# EAGLE board PCB-Switches (EAGLE 9.5.2)
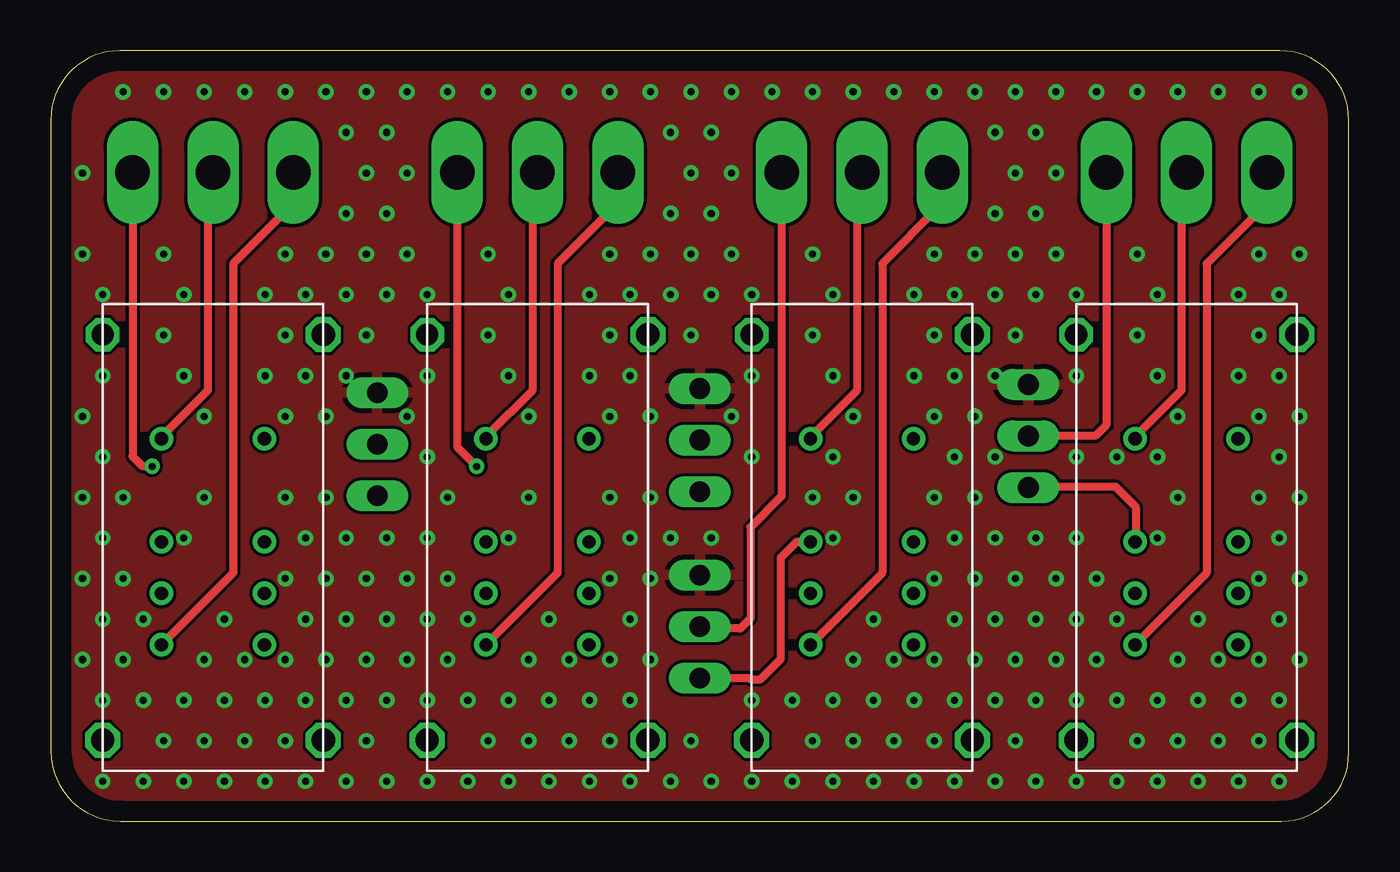
[diagram p0: board, top side]
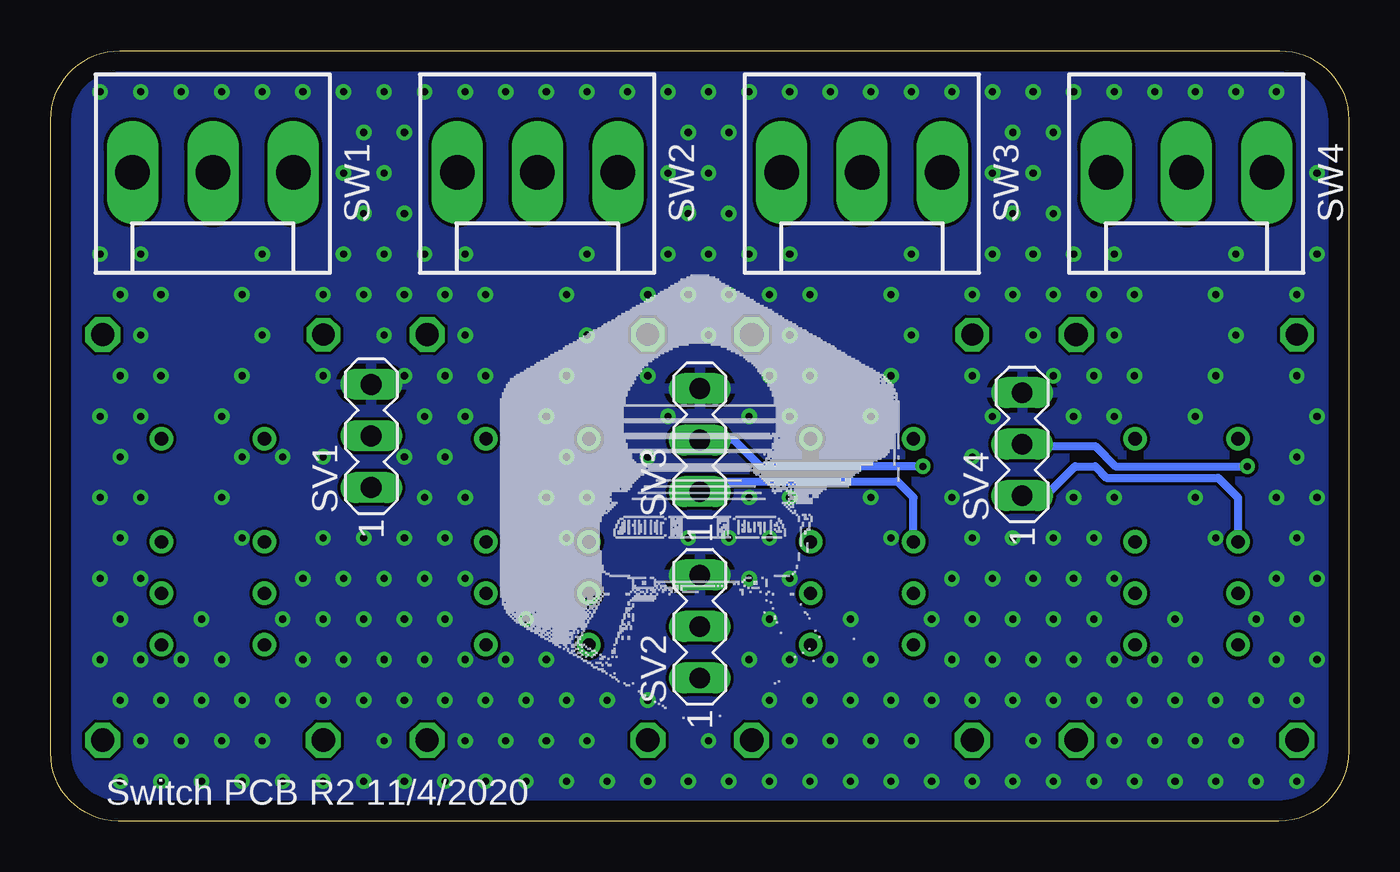
[diagram p1: board, bottom side, seen from below]

Size 64 x 38 mm. Coordinates in mm from the lower left corner, seen from the top.
Outline: 0,34.59 0,3.45 arc89 3.45,0 60.68,0 arc90 64,3.38 64,34.59 arc90 60.59,38 3.41,38 arc90 0,34.59
Copper layers (1*16): Top 0.035mm / dielectric 1.5mm / Bottom 0.035mm
Design rules "default": minimum track width 6mil, minimum drill 0.35mm, track to track 6mil, track to pad 6mil, pad to pad 6mil, via to via 6mil, smd to smd 6mil, copper to edge 40mil, drill to drill 6mil, minimum pad ring 10mil, minimum via ring 8mil, stop-mask expansion 4mil, vias tented up to drill 0.5mm, thermal gap 10mil

## Footprints (pad centres in the part's own frame; a part is rotated, then mirrored left to right if it is on the bottom)
MA03-1 = drill 1.016 long: 1 -2.54,0; 2 0,0; 3 2.54,0
KK-156-3 = drill 1.7 pad 2.184 long: 1 -3.96,0; 2 0,0; 3 3.96,0
ARCADESWITCH = drill 0.65: LI -2.54,-0.22; LN1 -2.54,4.86; LN2 -2.54,-5.3; LNC -2.54,-2.76; R1 2.54,-0.22; RN1 2.54,4.86; RN2 2.54,-5.3; RNC 2.54,-2.76 | drill 1.1 octagon: P$9 -5.44,10 | drill 1.15 octagon: P$10 -5.44,-10; P$11 5.44,10; P$12 5.44,-10

## Placement (x,y rotation side)
SV1  [MA03-1]  48.2,19 90 bottom
SV2  [MA03-1]  32,9.6 90 bottom
SV3  [MA03-1]  32,18.8 90 bottom
SV4  [MA03-1]  16.1,18.6 90 bottom
SW1  [KK-156-3]  56,32 180 bottom
SW2  [KK-156-3]  40,32 180 bottom
SW3  [KK-156-3]  24,32 180 bottom
SW4  [KK-156-3]  8,32 180 bottom
U$1  ARCADESWITCH  [ARCADESWITCH]  56,14 0 top
U$2  ARCADESWITCH  [ARCADESWITCH]  40,14 0 top
U$3  ARCADESWITCH  [ARCADESWITCH]  24,14 0 top
U$4  ARCADESWITCH  [ARCADESWITCH]  8,14 0 top

## Library data of the parts
SV1-SV4 = con-lstb; OC_FARNELL: unknown; OC_NEWARK: unknown
SW1-SW4 = con-molex; MF: MOLEX; OC_FARNELL: unknown; OC_NEWARK: unknown
U$1-U$4 = Arcade Switch

## Nets
GND: SV1.3 SV2.3 SV3.3 SV4.3
SW1A: SW1.2 U$1.LN1
SW1B: SW1.3 U$1.LN2
SW1J: SV1.1 U$1.LI
SW1P: SV1.2 SW1.1
SW2A: SW2.2 U$2.LN1
SW2B: SW2.3 U$2.LN2
SW2J: SV2.1 U$2.LI
SW2P: SV2.2 SW2.1
SW3A: SW3.2 U$3.LN1
SW3B: SW3.3 U$3.LN2
SW3J: SV3.1 U$3.LI
SW3P: SV3.2 SW3.1
SW4A: SW4.2 U$4.LN1
SW4B: SW4.3 U$4.LN2
SW4J: SV4.1 U$4.LI
SW4P: SV4.2 SW4.1

## Tracks (layer width: path | path; a pad name or v marks a point on that pad's centre or on a via)
GND  (via drill 0.35)
  other vias: 2.57,1.97 2.57,5.97 1.57,7.97 2.57,9.97 1.57,11.97 2.57,13.97 1.57,15.97 2.57,17.97 1.57,19.97 2.57,21.97 2.57,25.97 1.57,27.97 1.57,31.97 4.57,1.97 4.57,5.97 3.57,7.97 4.57,9.97 3.57,11.97 3.57,15.97 3.57,35.97 6.57,1.97 5.57,3.97 6.57,5.97 6.57,13.97 6.57,21.97 5.57,23.97 6.57,25.97 5.57,27.97 5.57,35.97 8.57,1.97 7.57,3.97 8.57,5.97 7.57,7.97 8.57,9.97 7.57,15.97 7.57,19.97 7.57,35.97 10.57,1.97 9.57,3.97 10.57,5.97 9.57,7.97 10.57,21.97 10.57,25.97 9.57,35.97 12.57,1.97 11.57,3.97 12.57,5.97 11.57,7.97 12.57,9.97 11.57,11.97 12.57,13.97 11.57,15.97 11.57,19.97 12.57,21.97 11.57,23.97 12.57,25.97 11.57,27.97 11.57,35.97 14.57,1.97 14.57,5.97 13.57,7.97 14.57,9.97 13.57,11.97 14.57,13.97 13.57,15.97 13.57,19.97 14.57,21.97 14.57,25.97 13.57,27.97 14.57,29.97 14.57,33.97 13.57,35.97 16.57,1.97 15.57,3.97 16.57,5.97 15.57,7.97 16.57,9.97 15.57,11.97 16.57,13.97 15.57,23.97 16.57,25.97 15.57,27.97 16.57,29.97 15.57,31.97 16.57,33.97 15.57,35.97 18.57,1.97 18.57,5.97 17.57,7.97 18.57,9.97 17.57,11.97 18.57,13.97 18.57,17.97 17.57,19.97 18.57,21.97 18.57,25.97 17.57,27.97 17.57,31.97 17.57,35.97 20.57,1.97 20.57,5.97 19.57,7.97 20.57,9.97 19.57,11.97 19.57,15.97 19.57,35.97 22.57,1.97 21.57,3.97 22.57,5.97 22.57,13.97 22.57,21.97 21.57,23.97 22.57,25.97 21.57,27.97 21.57,35.97 24.57,1.97 23.57,3.97 24.57,5.97 23.57,7.97 24.57,9.97 23.57,15.97 23.57,19.97 23.57,35.97 26.57,1.97 25.57,3.97 26.57,5.97 25.57,7.97 26.57,21.97 26.57,25.97 25.57,35.97 28.57,1.97 27.57,3.97 28.57,5.97 27.57,7.97 28.57,9.97 27.57,11.97 28.57,13.97 27.57,15.97 27.57,19.97 28.57,21.97 27.57,23.97 28.57,25.97 27.57,27.97 27.57,35.97 30.57,1.97 29.57,7.97 29.57,11.97 30.57,13.97 29.57,15.97 29.57,19.97 30.57,25.97 29.57,27.97 30.57,29.97 30.57,33.97 29.57,35.97 32.57,1.97 31.57,3.97 32.57,13.97 31.57,23.97 32.57,25.97 31.57,27.97 32.57,29.97 31.57,31.97 32.57,33.97 31.57,35.97 34.57,1.97 34.57,5.97 34.57,17.97 33.57,19.97 34.57,21.97 34.57,25.97 33.57,27.97 33.57,31.97 33.57,35.97 36.57,1.97 36.57,5.97 35.57,35.97 38.57,1.97 37.57,3.97 38.57,5.97 38.57,13.97 37.57,15.97 38.57,17.97 38.57,21.97 37.57,23.97 38.57,25.97 37.57,27.97 37.57,35.97 40.57,1.97 39.57,3.97 40.57,5.97 39.57,7.97 40.57,9.97 39.57,15.97 39.57,19.97 39.57,35.97 42.57,1.97 41.57,3.97 42.57,5.97 41.57,7.97 42.57,21.97 42.57,25.97 41.57,35.97 44.57,1.97 43.57,3.97 44.57,5.97 43.57,7.97 44.57,9.97 43.57,11.97 44.57,13.97 43.57,15.97 44.57,17.97 43.57,19.97 44.57,21.97 43.57,23.97 44.57,25.97 43.57,27.97 43.57,35.97 46.57,1.97 46.57,5.97 45.57,7.97 46.57,9.97 45.57,11.97 46.57,13.97 45.57,15.97 46.57,17.97 45.57,19.97 46.57,21.97 46.57,25.97 45.57,27.97 46.57,29.97 46.57,33.97 45.57,35.97 48.57,1.97 47.57,3.97 48.57,5.97 47.57,7.97 48.57,9.97 47.57,11.97 48.57,13.97 47.57,23.97 48.57,25.97 47.57,27.97 48.57,29.97 47.57,31.97 48.57,33.97 47.57,35.97 50.57,1.97 50.57,5.97 49.57,7.97 50.57,9.97 49.57,11.97 50.57,13.97 50.57,17.97 50.57,21.97 50.57,25.97 49.57,27.97 49.57,31.97 49.57,35.97 52.57,1.97 52.57,5.97 51.57,7.97 52.57,9.97 51.57,11.97 52.57,17.97 51.57,35.97 54.57,1.97 53.57,3.97 54.57,5.97 54.57,13.97 54.57,17.97 54.57,21.97 53.57,23.97 54.57,25.97 53.57,27.97 53.57,35.97 56.57,1.97 55.57,3.97 56.57,5.97 55.57,7.97 56.57,9.97 55.57,15.97 55.57,19.97 55.57,35.97 58.57,1.97 57.57,3.97 58.57,5.97 57.57,7.97 58.57,21.97 58.57,25.97 57.57,35.97 60.57,1.97 59.57,3.97 60.57,5.97 59.57,7.97 60.57,9.97 59.57,11.97 60.57,13.97 59.57,15.97 60.57,17.97 59.57,19.97 60.57,21.97 59.57,23.97 60.57,25.97 59.57,27.97 59.57,35.97 61.57,7.97 61.57,11.97 61.57,15.97 61.57,19.97 61.57,27.97 61.57,35.97
  pour Bottom: 0,0 0,38 64,38 64,0
  pour Top: 0,0 0,38 64,38 64,0
SW1A
  Top 0.406: SW1.2 55.75,31.75 55.75,21.25 53.5,19 U$1.LN1
SW1B
  Top 0.406: U$1.LN2 53.5,8.75 57,12.25 57,27.5 59.75,30.25 59.75,32 SW1.3
SW1J
  Top 0.406: SV1.1 48.24,16.5 52.5,16.5 53.5,15.5 53.5,13.82 U$1.LI
SW1P
  Top 0.406: SW1.1 52.04,19.54 51.5,19 SV1.2
SW2A
  Top 0.406: SW2.2 39.75,31.75 39.75,21.25 37.5,19 U$2.LN1
SW2B
  Top 0.406: U$2.LN2 37.5,8.75 41,12.25 41,27.5 43.75,30.25 43.75,32 SW2.3
SW2J
  Top 0.406: SV2.1 34.44,7.06 34.5,7 35,7 36,8 36,13 36.78,13.78 U$2.LI
SW2P
  Top 0.406: SW2.1 36.04,16.04 34.5,14.5 34.5,10 34,9.5 32.1,9.5 SV2.2
SW3A
  Top 0.406: SW3.2 23.75,31.75 23.75,21.25 21.5,19 U$3.LN1
SW3B
  Top 0.406: U$3.LN2 21.5,8.75 25,12.25 25,27.5 27.75,30.25 27.75,32 SW3.3
SW3J
  Bottom 0.406: SV3.1 31.5,16.76 22.26,16.76 21.46,15.96 U$3.LI
SW3P  (via drill 0.35)
  Top 0.406: SW3.1 20.04,18.46 v21,17.5
  Bottom 0.406: v21,17.5 29,17.5 30.3,18.8 SV3.2
SW4A
  Top 0.406: SW4.2 7.75,31.75 7.75,21.25 5.5,19 U$4.LN1
SW4B
  Top 0.406: U$4.LN2 5.5,8.75 9,12.25 9,27.5 11.75,30.25 11.75,32 SW4.3
SW4J
  Bottom 0.406: SV4.1 14.94,16.06 13.5,17.5 12.5,17.5 11.94,16.94 6.44,16.94 5.46,15.96 U$4.LI
SW4P  (via drill 0.35)
  Top 0.406: SW4.1 4.04,18 4.54,17.5 v5,17.5
  Bottom 0.406: SV4.2 16,18.5 12.5,18.5 11.5,17.5 v5,17.5

## Text on the board
bPlace: Switch PCB R2 11/4/2020
Reference: 11-4-2020 - (R2) - ADDED JUMPERS TO ALLOW / SWITCHING BETWEEN 5V AND GN, ENABLING / COMPATIBILITY ON ALL SWITCHES TO ALL / PCBS IN ARCADE (AUX/NEOPIXEL/RPI)